# Altium PCB RMII_Dongle.PcbDoc
Units mm, origin at the board's own origin, x right, y up, seen from the top; angles counter-clockwise.
Board outline 69.6 x 35.69 mm, 2 copper layers (Top Layer, Bottom Layer); 41 components, 39 nets, 153 pads, 41 vias.
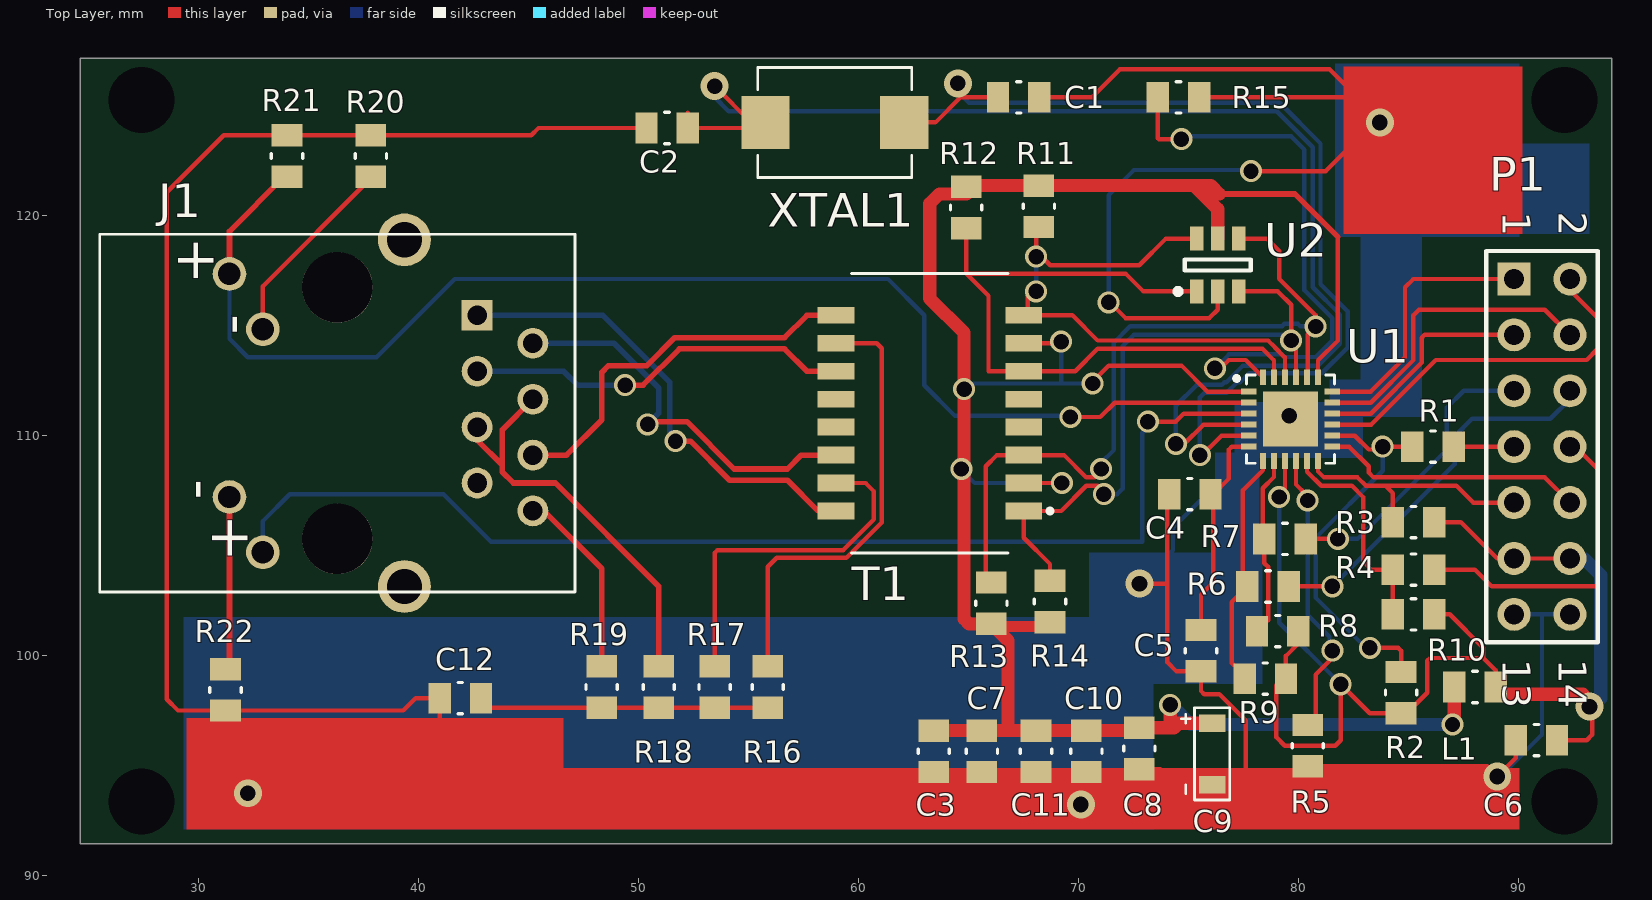
[diagram p0: Top Layer view]
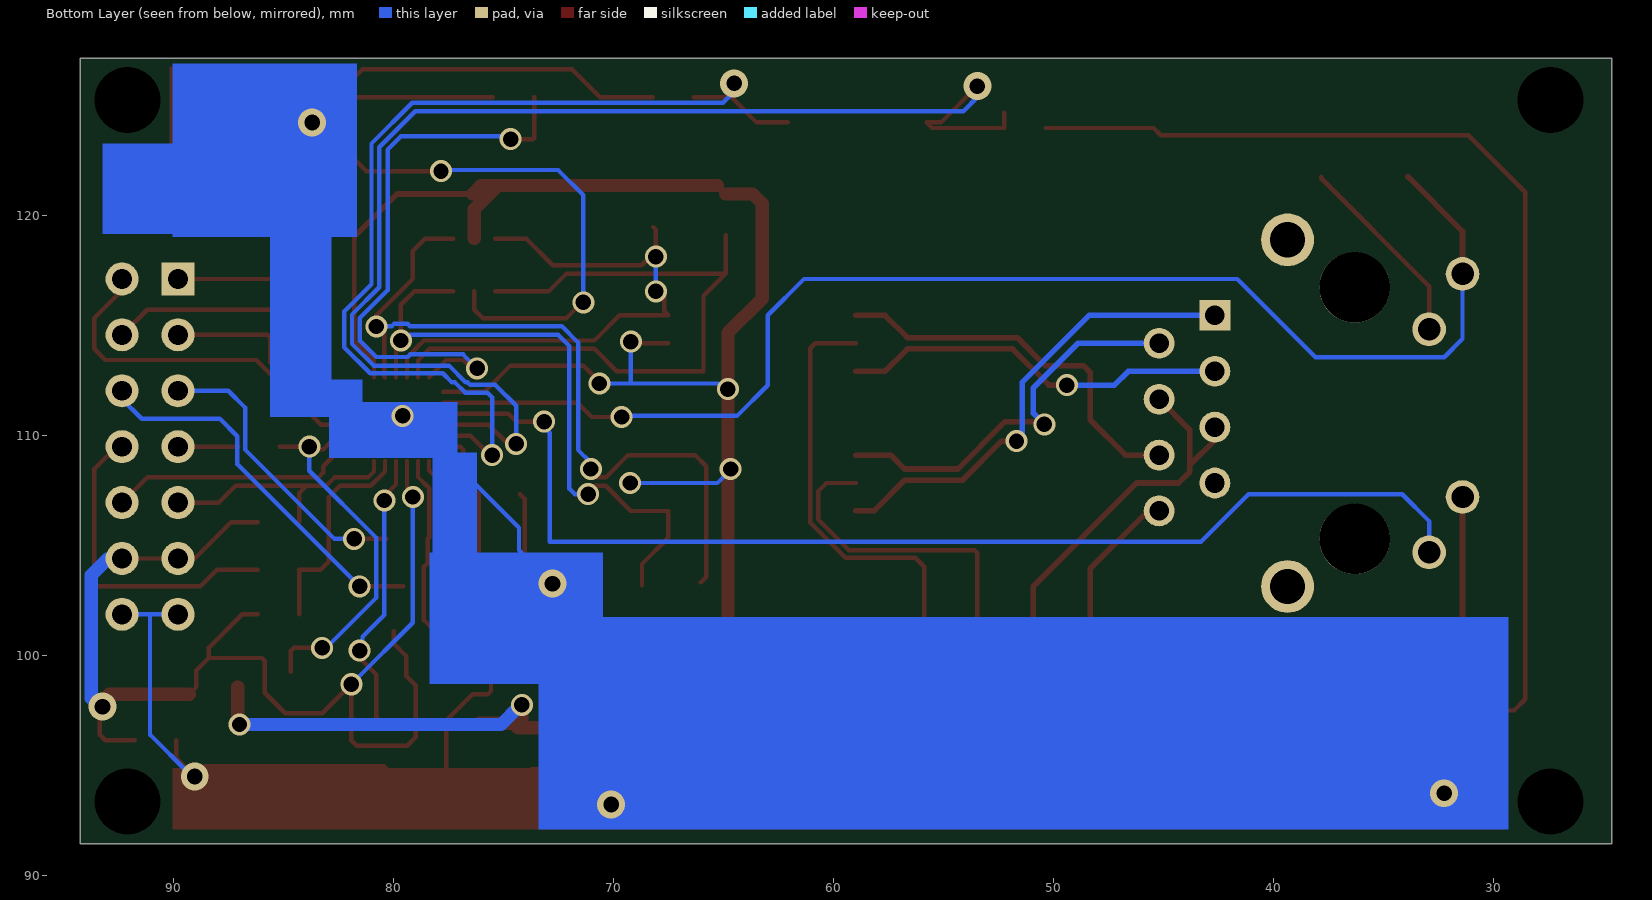
[diagram p1: Bottom Layer view, seen from below]

## Layer stack, top to bottom
Top Solder: solder mask 0.0102, Solder Resist, Dk 3.5
Top Layer: signal copper 0.0356
Dielectric 1: dielectric 0.32, FR-4, Dk 4.8
Bottom Layer: signal copper 0.0356
Bottom Solder: solder mask 0.0102, Solder Resist, Dk 3.5

## Board outline
24.638,127.127 94.234,127.127 94.234,91.44 24.638,91.44

## Design rules (kind name [scope] priority, off if disabled: settings)
Clearance [All] p1: gap=0.15 ignorepadtopadclearanceinfootprint=FALSE except(0: Arc-Hole Track-Hole SMDPad-Hole THPad-Hole Via-Hole Fill-Hole Poly-Hole Region-Hole Text-Hole)
ComponentClearance [All] p1: gap=0.15 collisioncheckmode=3 verticalgap=0.254 showdistances=FALSE
DiffPairsRouting [All] p1: maxlimit=0.254 minlimit=0.2 mostfreqgap=0.2 toplayer_minwidth=0.2 toplayer_maxwidth=0.381 toplayer_prefwidth=0.2 bottomlayer_minwidth=0.2 bottomlayer_maxwidth=0.381 bottomlayer_prefwidth=0.2 maxuncoupledlength=12.7
HoleSize [All] p1: absolutevalues=TRUE maxlimit=3.2 minlimit=0.025 maxpercent=80.000 minpercent=20.000
MatchedLengths "Schematic Matched Net Lengths_3" [InNet('RD_P')] p1: tolerance=2.54 checknetsindiffpair=TRUE checkdiffpairvsdiffpair=FALSE checkxsignals=FALSE checkothers=FALSE
MatchedLengths "Schematic Matched Net Lengths_2" [InNet('TD_N')] p2: tolerance=2.54 checknetsindiffpair=TRUE checkdiffpairvsdiffpair=FALSE checkxsignals=FALSE checkothers=FALSE
MatchedLengths "Schematic Matched Net Lengths_1" [InNet('TD_P')] p3: tolerance=2.54 checknetsindiffpair=TRUE checkdiffpairvsdiffpair=FALSE checkxsignals=FALSE checkothers=FALSE
MatchedLengths "Schematic Matched Net Lengths" [InNet('RD_N')] p4: tolerance=2.54 checknetsindiffpair=TRUE checkdiffpairvsdiffpair=FALSE checkxsignals=FALSE checkothers=FALSE
MinimumSolderMaskSliver [All] p1: minsoldermaskwidth=0.026
PolygonConnect [All] p1: connectstyle=Relief reliefconductorwidth=0.254 reliefentries=4 polygonreliefangle="90 Angle" airgapwidth=0.254
RoomDefinition RMII_Dongle [InComponentClass('RMII_Dongle')] p1: confinementstyle=ConfineIn formatcopy=TRUE lockcomponents=FALSE outline 24.638,91.567 24.511,91.44 94.234,91.44 94.234,127.254 94.107,127.127 24.638,127.127
RoutingVias [All] p1: holewidth=0.711 width=1.27 viastyle="Through Hole" minholewidth=0.711 minwidth=0.7 maxholewidth=3.2 maxwidth=3
SilkToSilkClearance [All] p1: silktosilkclearance=0.19
SilkToSolderMaskClearance [IsPad] p1 off: minsilkscreentomaskgap=0.254 clearancetoexposedcopper=TRUE
SolderMaskExpansion [All] p1: expansion=0.102
Width [All] p1: maxlimit=3 minlimit=0.15 preferedwidth=0.2
24 further rules are at their usual default settings.

## Classes and differential pairs
differential pair TD: +TD_P -TD_N
differential pair RD: +RD_P -RD_N

## Components (designator, comment, footprint, x,y, rotation, side; value= is the part's Value field where it differs from the comment)
C1 "30pF" 0805 67.285,125.349 r180 top
C2 "30pF" 0805 51.308,123.952 r0 top
C3 "100nF" 0805 63.424,95.631 r270 top
C4 "470pF" 0805 75.057,107.315 r0 top
C5 "1uF" 0805 75.565,100.203 r90 top
C6 "100nF" 0805 90.805,96.139 r0 top
C7 "100nF" 0805 65.608,95.631 r90 top
C8 "100nF" 0805 72.765,95.758 r90 top
C9 "10uF" "1206 Polarized" 75.273,97.107 r270 top
C10 "100nF" 0805 70.358,95.631 r90 top
C11 "100nF" 0805 68.072,95.631 r90 top
C12 "1nF" 0805 41.91,98.044 r0 top
J1 "J00-0045NL" "RJ45 J00-0045NL" 36.322,110.998 r90 top
L1 "IND 100UH 50MA 4 OHM SMD" 0805 88.011,98.552 r0 top value=100uH
P1 "Header 7X2" HDR2X7 89.789,117.094 r270 top
R1 "33" 0805 86.106,109.474 r0 top
R2 "10k" 0805 84.658,98.298 r270 top
R3 "1.5k" 0805 85.217,106.045 r0 top
R4 "33" 0805 85.217,103.886 r0 top
R5 "10k" 0805 80.416,95.885 r270 top
R6 "33" 0805 78.613,103.123 r0 top
R7 "33" 0805 79.384,105.283 r0 top
R8 "10k" 0805 79.051,101.092 r180 top
R9 "10k" 0805 78.486,98.933 r180 top
R10 "10k" 0805 85.217,101.854 r180 top
R11 "49.9" 0805 68.199,120.396 r270 top
R12 "49.9" 0805 64.897,120.345 r270 top
R13 "49.9" 0805 66.04,102.362 r90 top
R14 "49.9" 0805 68.707,102.438 r90 top
R15 "12.1k" 0805 74.549,125.349 r180 top
R16 "75" 0805 55.88,98.552 r270 top
R17 "75" 0805 53.467,98.552 r270 top
R18 "75" 0805 50.927,98.552 r270 top
R19 "75" 0805 48.336,98.552 r270 top
R20 "270" 0805 37.846,122.682 r90 top
R21 "10k" 0805 34.036,122.682 r90 top
R22 "270" 0805 31.242,98.425 r270 top
T1 "H1102NLT" TRANSFORMER 63.246,110.998 r180 top
U1 "LAN8742A-CZ-TR" "24-QFN (4x4)" 79.634,110.724 r0 top
U2 "USBLC6-4SC6" SOT23-6L 76.327,117.729 r90 top
XTAL1 "CRYSTAL 25.0000MHZ 8PF SMD" SMD-2 58.928,124.206 r180 top

## Footprints (in the part's own frame and the unit in brackets; to place one, negate y for a bottom-side part, rotate by r counter-clockwise, add the part's x,y. Pads: shape width x height; smd on the part's side, far side on the other; paste and mask are expansions set on the pad)
"24-QFN (4x4)" [mm]
  rect 0.71x0.27 smd: 1(-1.9,1.25) 2(-1.9,0.75) 3(-1.9,0.25) 4(-1.9,-0.25) 5(-1.9,-0.75) 6(-1.9,-1.25) 13(1.9,-1.25) 14(1.9,-0.75) 15(1.9,-0.25) 16(1.9,0.25) 17(1.9,0.75) 18(1.9,1.25)
  rect 0.27x0.71 smd: 7(-1.25,-1.9) 8(-0.75,-1.9) 9(-0.25,-1.9) 10(0.25,-1.9) 11(0.75,-1.9) 12(1.25,-1.9) 19(1.25,1.9) 20(0.75,1.9) 21(0.25,1.9) 22(-0.25,1.9) 23(-0.75,1.9) 24(-1.25,1.9)
  rect 2.5x2.5 smd: 25(0,0)
  silkscreen extent -2.55,-2 2,2
0805 [mil]
  rect 40x55 smd: 1(-37,0) 2(37,0)
  silkscreen extent -4,-28 4,28
"1206 Polarized" [mm]
  rect 0.8x1.2 smd: 1(0.2,0.8) 2(3,0.8)
  silkscreen extent -0.51,-0.6 3.68,1.6
HDR2X7 [mm] "Connector; Header; 7x2 Position"
  rect 1.5x1.5 hole 0.9: 1(0,0)
  round 1.5 hole 0.9: 2(0,2.54) 3(2.54,0) 4(2.54,2.54) 5(5.08,0) 6(5.08,2.54) 7(7.62,0) 8(7.62,2.54) 9(10.16,0) 10(10.16,2.54) 11(12.7,0) 12(12.7,2.54) 13(15.24,0) 14(15.24,2.54)
  silkscreen extent -1.27,-1.27 16.51,3.81
"RJ45 J00-0045NL" [mm]
  rect 1.398x1.398 hole 0.89: 1(4.445,-6.35)
  round 1.398 hole 0.89: 2(3.175,-8.89) 3(1.905,-6.35) 4(0.635,-8.89) 5(-0.635,-6.35) 6(-1.905,-8.89) 7(-3.175,-6.35) 8(-4.445,-8.89)
  round 1.53 hole 1.02: 9(6.325,4.9) 10(3.81,3.38) 11(-3.81,4.9) 12(-6.325,3.38)
  round 3.2 hole 3.2 unplated: None(-5.715,0) None(5.715,0)
  round 2.4 hole 1.6: S1(-7.875,-3.05) S2(7.875,-3.05)
  silkscreen extent -8.13,-10.79 8.13,10.79
SMD-2 [mm]
  rect 2.2x2.4 smd: 1(-3.15,0) 2(3.15,0)
  silkscreen extent -3.5,-2.5 3.5,2.5
SOT23-6L [mm]
  rect 1.1x0.6 smd: 1(-1.2,0.95) 2(-1.2,0) 3(-1.2,-0.95) 4(1.2,-0.95) 5(1.2,0) 6(1.2,0.95)
  silkscreen extent -1.32,-1.5 0.25,1.92, body extent -0.86,-1.51 0.87,1.52, height 1.25
TRANSFORMER [mm]
  rect 1.67x0.76 smd: 1(-4.265,4.445) 2(-4.265,3.175) 3(-4.265,1.905) 4(-4.265,0.635) 5(-4.265,-0.635) 6(-4.265,-1.905) 7(-4.265,-3.175) 8(-4.265,-4.445) 9(4.265,-4.445) 10(4.265,-3.175) 11(4.265,-1.905) 12(4.265,-0.635) 13(4.265,0.635) 14(4.265,1.905) 15(4.265,3.175) 16(4.265,4.445)
  silkscreen extent -5.56,-6.35 3.55,6.35

## Part data
C1 C2: library part "CAP 30pF 0805", "CAP CER 30PF 25V NP0 0805", Package=0805, Rating=25V, Tolerance=20%, Digikey=399-17444-1-ND, Digikey Link=https://www.digikey.ca/product-detail/en/kemet/C0805C300M3GAC7800/399-17444-1-ND/8570411, MF=Yageo, MP=C0805C300M3GAC7800, Price="0.43 CAD"
C3 C6 C7 C8 C10 C11: library part "CAP 100nF 0805", "CAP CER 0.1UF 50V X7R 0805", Package=0805, Rating=50V, Tolerance=10%, Digikey=311-1140-1-ND, Digikey Link=https://www.digikey.ca/products/en?keywords=311-1140-1-ND, MF=Yageo, MP=CC0805KRX7R9BB104, Price="0,119 CAD"
C4: library part "CAP 470pF 0805", "CAP CER 470PF 50V C0G/NPO 0805", Package=0805, Rating=50V, Tolerance=5%, Digikey=311-1119-1-ND, Digikey Link=https://www.digikey.ca/products/en?keywords=311-1119-1-ND, MF=Yageo, MP=CC0805JRNPO9BN471, Price="0,135 CAD"
C5: library part "CAP 1uF 0805", "CAP CER 1UF 50V X7R 0805", Package=0805, Rating=50V, Tolerance=10%, Digikey=1276-1029-1-ND, Digikey Link=https://www.digikey.ca/product-detail/en/samsung-electro-mechanics/CL21B105KBFNNNE/1276-1029-1-ND/3889115, MF="Samsung Electro-Mechanics", MP=CL21B105KBFNNNE, Price="0,172 CAD"
C9: library part "CAP TANT 10UF 1206", "10µF Molded Tantalum Capacitors 10V 1206 (3216 Metric) 3.8Ohm", Package="1206 KEMET", Digikey=399-3684-1-ND, Digikey Link=https://www.digikey.ca/product-detail/en/kemet/T491A106K010AT/399-3684-1-ND/819009, MF=KEMET, MP=T491A106K010AT, Price="0.59 CAD"
C12: library part "CAP 1nF 0805", "CAP CER 1000PF 50V X7R 0805", Package=0805, Rating=50V, Tolerance=10%, Digikey=311-1127-1-ND, Digikey Link=https://www.digikey.ca/products/en?keywords=311-1127-1-ND, MF=Yageo, MP=CC0805KRX7R9BB102, Price="0.1 CAD"
J1: "1 Port RJ45 Magjack Connector Through Hole 10/100 Base-TX, AutoMDIX", Package=None, Digikey=553-1619-5-ND, Digikey Link=https://www.digikey.com/product-detail/en/pulse-electronics-network/J00-0045NL/553-1619-5-ND/1036860?utm_source=snapeda&utm_medium=aggregator&utm_campaign=symbol, MF="Pulse Electronics", MP=J00-0045NL, SnapEDA_Link=https://www.snapeda.com/parts/J00-0045NL/Pulse%20Electronics%20Network/view-part/87956/?ref=snap
L1: "100µH Unshielded Wirewound Inductor 50mA 4Ohm 0805 (2012 Metric)", Digikey=587-2048-1-ND, Digikey Link=https://www.digikey.ca/product-detail/en/taiyo-yuden/LBR2012T101K/587-2048-1-ND/1788995, MF="Taiyo Yuden", MP=LBR2012T101K, Revision="July-2002: Re-released for DXP Platform."
P1: "Header, 7-Pin, Dual row", LatestRevisionDate=17-Jul-2002, LatestRevisionNote="Re-released for DXP Platform.", Publisher="Altium Limited"
R1 R4 R6 R7: library part "RES 33 0805", "RES SMD 33 OHM 1% 1/8W 0805", Package=0805, Rating=0.125W, Digikey=311-33.0CRCT-ND, Digikey Link=https://www.digikey.ca/product-detail/en/yageo/RC0805FR-0733RL/311-33.0CRCT-ND/730809, MF=Yageo, MP=RC0805FR-0733RL, Price="0.15 CAD"
R2 R5 R8 R9 R10 R21: library part "RES 10k 0805", "RES SMD 10K OHM 1% 1/8W 0805", Package=0805, Rating=0.125W, Tolerance=1%, Digikey=311-10.0KCRCT-ND, Digikey Link=https://www.digikey.ca/products/en?keywords=311-10.0KCRCT-ND, MF=Yageo, MP=RC0805FR-0710KL, Price="0.061 CAD"
R3: library part "RES 1.5k 0805", "RES SMD 1.5K OHM 1% 1/8W 0805", Package=0805, Rating=0.125W, Tolerance=1%, ComponentLink1Description=digikey, ComponentLink1URL=https://www.digikey.ca/en/products/detail/panasonic-electronic-components/ERJ-6ENF1022V/111476, Digikey=311-1.50KCRCT-ND, Digikey Link=https://www.digikey.ca/product-detail/en/yageo/RC0805FR-071K5L/311-1.50KCRCT-ND/730443, MF=Yageo, MP=RC0805FR-071K5L, Price="0.15 CAD"
R11 R12 R13 R14: library part "RES 49.9 0805", "RES SMD 49.9 OHM 1% 1/8W 0805", Package=0805, Rating=0.125W, Tolerance=1%, Digikey=311-49.9CRCT-ND, Digikey Link=https://www.digikey.ca/product-detail/en/yageo/RC0805FR-0749R9L/311-49.9CRCT-ND/730931, MF=Yageo, MP=RC0805FR-0749R9L, Price="0.15 CAD"
R15: library part "RES 12.1k 0805", "RES SMD 12.1K OHM 1% 1/8W 0805", Package=0805, Rating=0.125W, Tolerance=1%, Digikey=311-12.1KCRCT-ND, Digikey Link=https://www.digikey.ca/product-detail/en/yageo/RC0805FR-0712K1L/311-12.1KCRCT-ND/730517, MF=Yageo, MP=RC0805FR-0712K1L, Price="0.15 CAD"
R16 R17 R18 R19: library part "RES 75 0805", "RES SMD 75 OHM 1% 1/8W 0805", Package=0805, Rating=0.125W, Tolerance=1%, Digikey=311-75.0CRCT-ND, Digikey Link=https://www.digikey.ca/product-detail/en/yageo/RC0805FR-0775RL/311-75.0CRCT-ND/731079, MF=Yageo, MP=RC0805FR-0775RL, Price="0.15 CAD"
R20 R22: library part "RES 270 0805", "RES SMD 270 OHM 5% 1/8W 0805", Package=0805, Rating=0.125W, Digikey=311-270ARCT-ND, Digikey Link=https://www.digikey.ca/product-detail/en/yageo/RC0805JR-07270RL/311-270ARCT-ND/731238, MF=Yageo, MP=RC0805JR-07270RL, Price="0.054 CAD"
T1: "Isolation and Data Interface _Encapsulated_ Pulse Transformer 1:1 Transmitter, 1:1 Receiver Surface Mount", Package=SOIC-16, Digikey=553-1323-5-ND, Digikey Link=https://www.digikey.ca/en/products/detail/pulse-electronics-network/H1102NL/1036940?s=N4IgTCBcDaIBIEYEAYwDkAyIC6BfIA, MF="Pulse Electronics", MP=H1102NL, Price="7.99 CAD"
U1: "LAN8742A-CZ-TR - Small Footprint RMII 10/100 Ethernet, Transceiver with HP Auto-MDIX and flexPWR Technology SQFN-24", Digikey=LAN8742A-CZ-CT-ND, Digikey Link=https://www.digikey.ca/product-detail/en/microchip-technology/LAN8742A-CZ-TR/LAN8742A-CZ-CT-ND/8256089, MF="Microchip Technology", MP=LAN8742A-CZ-TR
XTAL1: library part "XTAL 25MHZ 8PF SMD", "25MHz ±50ppm Crystal 8pF 70 Ohms 2-SMD, No Lead", Frequency=25MHz, Load Capacitance=8pF, Package="2-SMD, No Lead", Digikey=644-1041-1-ND, Digikey Link=https://www.digikey.ca/product-detail/en/ndk-america-inc/NX5032GA-25.000000MHZ-LN-CD-1/644-1041-1-ND/1128913, ESR="70 Ohms", MF="NDK America, Inc.", MP=NX5032GA-25.000000MHZ-LN-CD-1, Price="0.95 CAD"

## Free pads (board coordinates)
  round 1.524 hole 3: 2(27.432,93.345) 2(27.432,125.222) 2(92.075,93.345) 2(92.075,125.222)

## Via types
v1: diameter 1, hole 0.7, Top Layer to Bottom Layer, tented both sides, 33 vias
v2: diameter 1.27, hole 0.711, Top Layer to Bottom Layer, 8 vias

## Nets (pads, with @x,y where several pads share a name; then routed paths per layer and width w, separated by ;. In a path a pad name is that pad's centre, name@x,y a point inside that pad or via, vN(x,y) a via of type N, cw(c..) or ccw(c..) an arc to the next point about the centre after c; other vN are vias at no path point)
+3.3V: C6.2 L1.2 P1.11 P1.12 R2.2 R3.2 R8.1 R9.1 R10.1 U1.9 | length 57.7
  Top Layer w0.2: v1@79.384,107.375 U1.9 ; R8.1 79.991,100.532 79.426,99.967 79.426,99.06 78.994,98.628 78.994,96.266 79.375,95.885 81.661,95.885 81.915,96.139 v1(81.915,98.679) 83.236,97.358 R2.2 84.912,97.358 85.852,98.298 85.852,99.746 85.979,99.873 88.392,99.873 ; R10.1 86.868,101.854 88.392,100.33 88.392,99.873 ; R3.2 87.376,106.045 89.027,104.394 P1.11 P1.12 ; L1.2@89.281,98.222 L1.2 88.951,99.314 88.392,99.873 ; C6.2 93.091,96.139 93.345,96.393 93.345,97.536 v2(93.218,97.663) 93.218,97.917 92.913,98.222
  Top Layer w0.6: L1.2@89.281,98.222 92.913,98.222
  Bottom Layer w0.2: v1(79.121,107.188) 79.121,101.473 v1@81.788,98.806 ; P1.12 P1.12@92.964,104.394
  Bottom Layer w0.6: P1.12@92.964,104.394 93.726,103.632 93.726,98.044
GND: C1.1 C2.1 C3.2 C4.1 C5.1 C6.1 C7.1 C8.1 C9.2 C10.1 C11.1 C12.1 P1.13 P1.14 R5.2 R15.1 R20.2 R21.2 R22.2 U1.25 U2.2 | length 210.5
  Top Layer w0.2: C2.1 45.466,123.952 45.136,123.622 R20.2 31.166,123.622 28.575,121.031 28.575,97.993 29.083,97.485 R22.2 39.319,97.485 39.878,98.044 C12.1 40.97,96.317 42.672,94.615 63.424,94.615 63.5,94.691 C7.1 C11.1 C10.1 72.638,94.691 C8.1 73.711,94.818 74.422,94.107 C9.2 77.597,94.107 ; C1.1 70.612,125.349 71.882,126.619 81.407,126.619 82.677,125.349 ; v1@71.501,115.951 72.136,115.316 75.945,115.316 76.327,115.698 U2.2 ; v2(72.771,103.251) 74.04,103.251 74.041,103.252 ; C4.1@74.244,107.315 74.041,107.112 74.041,103.252 ; R15.1 82.677,125.349 ; v1(77.839,121.997) 81.23,121.997 83.439,124.206 v2(83.693,124.206) ; v2@83.566,124.46 82.677,125.349 ; v2@89.332,94.488 v2(89.027,94.488) ; C6.1 89.865,95.326 v2(89.027,94.488) ; 74.041,103.252 74.041,99.676 74.454,99.263 C5.1 75.565,98.374 75.717,98.222 76.403,98.222 77.597,97.028 77.597,94.107 ; 77.597,94.107 79.578,94.107 R5.2 88.57,94.945 v2(89.027,94.488)
  Bottom Layer w0.2: v1(71.374,116.028) 71.374,120.904 72.517,122.047 v1@77.755,122.047 ; v2@73.025,103.505 74.295,104.775 74.295,105.791 79.325,110.821 80.722,110.821 ; 83.693,113.792 v2(83.693,124.206) ; v2@89.281,94.615 91.059,96.393 91.059,101.854 ; P1.13 91.059,101.854 ; P1.14 91.059,101.854
  other v1: 79.578,110.871
  other v2: 70.104,93.218 32.258,93.726
LA: J1.9 R21.1 U1.2 | length 61.1
  Top Layer w0.2: v1(69.629,110.821) 70.993,110.821 71.646,111.474 U1.2
  Top Layer w0.254: J1.9 31.422,119.255 R21.1@33.909,121.742
  Bottom Layer w0.2: J1.9 31.422,114.374 32.258,113.538 38.102,113.538 41.658,117.094 61.341,117.094 62.992,115.443 62.992,112.268 64.389,110.871 v1@69.469,110.871
LAN_VDD1A: C3.1 C7.2 C8.2 C9.1 C10.2 C11.2 L1.1 R11.1 R12.1 R13.1 R14.1 T1.2 T1.7 U1.1 U1.19 U2.5 | length 109.5
  Top Layer w0.2: R12.1@64.897,120.955 R12.1@65.278,121.336 ; R13.1 R13.1@66.167,101.295 ; T1.2 v1@68.961,107.823 ; T1.7 v1@68.961,114.173 ; v1@70.739,112.522 71.374,113.157 74.679,113.157 75.862,111.974 U1.1 ; C8.2@72.638,96.571 C8.2 ; U1.19 80.884,113.396 81.788,114.3 81.788,118.999 ; v1@87.046,96.825 v1@87.071,96.85
  Top Layer w0.254: 76.403,120.955 79.832,120.955 81.788,118.999
  Top Layer w0.5: R13.1@66.167,101.295 R14.1@68.707,101.295
  Top Layer w0.6: C3.1@63.5,96.571 C7.2 66.802,96.571 ; R12.1@64.897,120.955 63.678,120.955 63.246,120.523 63.246,116.205 64.803,114.648 v1(64.803,112.091) 64.803,101.644 65.024,101.422 R13.1 ; R12.1@65.278,121.336 R11.1 75.26,121.336 ; R13.1@66.167,101.295 66.802,100.66 66.802,96.571 ; C8.2@72.638,96.571 C10.2 C11.2 66.802,96.571 ; C8.2 74.168,96.698 ; v1(74.168,97.739) 74.168,96.698 ; C9.1 74.555,96.907 74.346,96.698 74.168,96.698 ; U2.5 76.327,120.269 75.26,121.336 ; 76.403,120.955 76.022,121.336 75.26,121.336 ; v1@87.071,96.85 L1.1
  Bottom Layer w0.2: v1@64.77,108.331 65.278,107.823 v1(69.248,107.823) ; v1@65.024,112.141 65.228,112.345 69.215,112.345 ; v1(69.215,114.25) 69.215,112.345 ; v1(70.645,112.345) 69.215,112.345
  Bottom Layer w0.6: v1@74.295,97.663 75.108,96.85 v1(86.995,96.85)
  other v1: 64.676,108.458
LC: J1.10 R20.1 | length 9
  Top Layer w0.2: J1.10 32.942,116.762 37.846,121.666 R20.1
NetC1_2: C1.2 U1.5 XTAL1.1 | length 44.9
  Top Layer w0.2: XTAL1.1 63.5,124.206 64.643,125.349 C1.2 ; v1@75.489,108.966 76.497,109.974 U1.5
  Bottom Layer w0.2: v2@64.516,125.603 65.024,125.095 79.146,125.095 80.995,123.246 80.995,116.858 82.234,115.619 82.234,113.984 81.057,112.807 77.755,112.807 77.343,112.395 77.203,112.395 76.738,111.93 75.735,111.93 75.514,111.709 v1(75.514,109.093)
  other v2: 64.516,125.984
NetC2_2: C2.2 U1.4 XTAL1.2 | length 58.5
  Top Layer w0.2: C2.2@52.248,124.638 C2.2 55.524,123.952 XTAL1.2 55.118,124.206 v2(53.467,125.857) ; v1@74.803,109.601 75.676,110.474 U1.4
  Bottom Layer w0.2: v2@53.467,125.349 54.102,124.714 79.014,124.714 80.645,123.083 80.645,116.713 81.884,115.474 81.884,114.142 80.899,113.157 77.47,113.157 76.708,112.395 76.626,112.395 76.511,112.28 75.373,112.28 74.422,111.329 v1(74.422,109.601)
NetC4_2: C4.2 C5.2 U1.6 | length 9.7
  Top Layer w0.2: C5.2 75.565,102.742 76.124,103.301 76.124,107.315 76.835,108.026 76.835,109.347 76.962,109.474 U1.6
NetC12_2: C12.2 R16.2 R17.2 R18.2 R19.2 | length 13.2
  Top Layer w0.2: C12.2 43.282,97.612 R19.2 R18.2 R17.2 R16.2
NetJ1_1: J1.1 T1.16 | length 21.3
  Top Layer w0.254: v1(51.689,109.728) 52.368,109.728 54.146,107.95 56.769,107.95 58.166,106.553 T1.16
  Bottom Layer w0.254: J1.1 48.387,115.443 51.435,112.395 51.435,110.109 v1@51.689,109.855
NetJ1_2: J1.2 T1.14 | length 18
  Top Layer w0.254: v1(50.419,110.49) 50.538,110.609 52.205,110.609 54.356,108.458 56.769,108.458 57.404,109.093 T1.14
  Bottom Layer w0.254: J1.2 48.895,114.173 50.927,112.141 50.927,110.998 v1@50.546,110.617
NetJ1_3: J1.3 T1.11 | length 17.7
  Top Layer w0.254: v1(49.403,112.268) 50.216,112.268 51.867,113.919 56.642,113.919 57.658,112.903 T1.11
  Bottom Layer w0.254: J1.3 46.609,112.903 47.244,112.268 v1(49.403,112.268)
NetJ1_4: J1.4 J1.5 R18.1 | length 19
  Top Layer w0.254: J1.5 42.672,109.779 43.815,108.636 ; J1.4 43.815,110.236 43.815,108.636 ; R18.1 50.927,103.124 46.228,107.823 44.323,107.823 43.815,108.331 43.815,108.636
NetJ1_6: J1.6 T1.9 | length 17.7
  Top Layer w0.254: J1.6 46.736,109.093 48.336,110.693 48.336,112.852 48.641,113.157 50.386,113.157 51.656,114.427 56.642,114.427 57.658,115.443 T1.9
NetJ1_8: J1.8 R19.1 | length 8.7
  Top Layer w0.254: J1.8 45.72,106.553 48.336,103.937 R19.1
NetP1_2: P1.2 U1.15 | length 17.2
  Top Layer w0.2: U1.15 83.296,110.474 86.233,113.411 93.091,113.411 93.599,113.919 93.599,115.316 92.329,116.586 P1.2
NetR1_1: R1.1 R2.1 U1.14 | length 17.7
  Top Layer w0.2: U1.14 82.558,109.974 83.185,109.347 v1@83.82,109.347 ; v1(83.236,100.33) 84.531,100.33 84.658,100.203 R2.1 ; v1(83.82,109.474) R1.1
  Bottom Layer w0.2: v1(83.236,100.33) 83.058,100.33 80.772,102.616 80.772,105.328 83.82,108.376 v1@83.82,109.347
NetR4_1: R4.1 R10.2 U1.11 | length 10
  Top Layer w0.2: U1.11 80.384,108.338 81.026,107.696 82.423,107.696 82.931,107.188 82.931,104.267 83.312,103.886 R4.1 R10.2
NetR5_1: R5.1 U1.10 | length 12.5
  Top Layer w0.2: U1.10 79.884,107.755 v1@80.324,107.315 ; R5.1 80.772,97.181 80.772,99.111 81.534,99.873 v1(81.534,100.203)
  Bottom Layer w0.2: v1(80.416,107.029) 80.416,101.829 81.407,100.838 v1@81.407,100.457
NetR6_1: R6.1 R9.2 U1.7 | length 10.8
  Top Layer w0.2: R9.2@77.546,99.06 76.962,99.644 76.962,102.412 R6.1 77.47,103.326 77.47,107.491 78.384,108.405 U1.7
NetR7_1: R7.1 R8.2 U1.8 | length 8.3
  Top Layer w0.2: R8.2 78.613,101.594 78.613,104.013 78.444,104.182 R7.1 78.371,105.356 78.371,107.581 78.884,108.094 U1.8
NetR15_2: R15.2 U1.24 | length 26
  Top Layer w0.2: R15.2 73.609,123.495 73.66,123.444 v1(74.676,123.444) ; v1@76.581,113.157 76.835,113.411 77.597,113.411 U1.24
  Bottom Layer w0.2: v1@74.803,123.571 79.662,123.571 80.264,122.969 80.264,116.586 81.534,115.316 81.534,114.3 80.784,113.55 79.351,113.55 79.236,113.665 76.835,113.665 v1(76.2,113.03)
NetR16_1: R16.1 T1.10 | length 20.6
  Top Layer w0.2: R16.1 55.88,104.013 56.292,104.425 59.454,104.425 61.056,106.027 61.056,113.95 60.833,114.173 T1.10
NetR17_1: R17.1 T1.15 | length 16.2
  Top Layer w0.2: R17.1 53.467,104.648 53.594,104.775 59.309,104.775 60.706,106.172 60.706,107.442 60.325,107.823 T1.15
RA: J1.12 U1.3 | length 53.1
  Top Layer w0.2: v1(73.152,110.609) 74.41,110.609 74.775,110.974 U1.3
  Bottom Layer w0.2: J1.12 32.942,106.094 34.163,107.315 41.148,107.315 43.307,105.156 72.898,105.156 72.898,110.109 73.152,110.363 v1(73.152,110.609)
RC: J1.11 R22.1 | length 7.9
  Top Layer w0.254: R22.1 31.422,99.545 J1.11
RD_N: R11.2 T1.8 U1.22 U2.6 | length 25.4
  Top Layer w0.2: v1@67.818,116.459 67.691,116.332 67.691,115.623 T1.8 69.723,115.443 70.866,114.3 78.613,114.3 78.912,114.001 78.912,113.989 79.351,113.55 79.363,113.55 79.384,113.529 U1.22 ; R11.2 68.072,119.329 v1(68.072,118.11) 68.326,118.11 68.713,117.723 72.765,117.723 73.971,118.929 U2.6
  Bottom Layer w0.2: v1(68.072,116.529) v1@68.072,117.856
RD_P: R12.2 T1.6 U1.23 U2.1 | length 31.8
  Top Layer w0.2: R12.2@64.897,119.075 64.897,117.348 64.922,117.323 ; U2.1 72.949,116.529 72.155,117.323 64.922,117.323 ; U1.23 78.884,113.394 78.359,113.919 70.866,113.919 69.85,112.903 T1.6 65.913,112.903 65.913,116.332 64.922,117.323
RMII_CRS_DV: P1.8 R4.2 | length 14.7
  Top Layer w0.2: R4.2 88.011,103.886 88.773,103.124 93.471,103.124 93.599,103.252 93.599,108.458 92.583,109.474 P1.8
RMII_MDC: P1.10 U1.13 | length 12
  Top Layer w0.2: U1.13 82.296,109.474 83.185,108.585 83.185,108.299 83.407,108.077 91.186,108.077 P1.10
RMII_MDIO: P1.9 R3.1 U1.12 | length 11.8
  Top Layer w0.2: U1.12 80.884,108.346 81.153,108.077 82.677,108.077 83.058,107.696 83.947,107.696 ; R3.1 84.277,107.366 83.947,107.696 ; P1.9 87.935,106.934 87.173,107.696 83.947,107.696
RMII_REF_CLK: P1.7 R1.2 | length 2.9
  Top Layer w0.2: R1.2 P1.7 P1.7@89.662,109.347
RMII_RXD0: P1.5 R7.2 | length 13.2
  Top Layer w0.2: R7.2 v1@81.661,105.283
  Bottom Layer w0.2: v1(81.788,105.283) 82.677,105.283 86.741,109.347 86.741,111.252 87.503,112.014 P1.5
RMII_RXD1: P1.6 R6.2 | length 17.2
  Top Layer w0.2: R6.2 v1@81.279,103.123
  Bottom Layer w0.2: v1(81.534,103.124) 87.091,108.681 87.091,109.951 87.884,110.744 91.44,110.744 92.329,111.633 P1.6
RMII_TX_EN: P1.3 U1.16 | length 10.4
  Top Layer w0.2: U1.16 83.275,110.974 85.598,113.297 85.598,114.427 85.725,114.554 P1.3
RMII_TXD0: P1.4 U1.17 | length 14.2
  Top Layer w0.2: U1.17 83.28,111.474 85.217,113.411 85.217,115.443 85.471,115.697 91.186,115.697 P1.4
RMII_TXD1: P1.1 U1.18 | length 12.2
  Top Layer w0.2: U1.18 83.272,111.974 84.836,113.538 84.836,116.713 85.217,117.094 P1.1
TD_N: R13.2 T1.3 U1.20 U2.4 | length 35
  Top Layer w0.2: R13.2 65.786,103.556 65.786,108.585 66.294,109.093 T1.3 69.342,109.093 70.358,108.077 70.739,108.077 v1@70.866,108.204 ; U2.4 78.556,118.929 79.121,118.364 79.121,117.095 80.772,115.444 v1(80.772,114.935) 80.412,114.575 80.412,112.652 U1.20
  Bottom Layer w0.2: v1(71.026,108.458) 71.026,108.745 71.609,109.328 71.609,114.212 72.351,114.954 79.255,114.954 79.351,115.05 79.972,115.05 80.068,114.954 80.372,114.954 v1@80.391,114.935
TD_P: R14.2 T1.1 U1.21 U2.3 | length 29
  Top Layer w0.2: R14.2@68.707,103.175 68.707,104.14 67.511,105.336 T1.1 69.215,106.553 70.358,107.696 70.866,107.696 v1@70.993,107.569 ; U2.3 79.051,116.529 79.662,115.918 v1(79.662,114.3) 79.884,114.078 U1.21
  Bottom Layer w0.2: v1(71.153,107.315) 71.755,107.315 72.009,107.569 72.009,114.046 72.517,114.554 79.248,114.554 v1@79.375,114.427
pads on no net: J1.7 J1.None J1.S1 J1.S2 T1.4 T1.5 T1.12 T1.13

## Other copper
Top Layer:
  rectangle net GND: 82.042,119.126 90.17,126.746
  rectangle net GND: 45.72,92.075 90.043,94.869
  rectangle net GND: 29.464,92.075 46.609,97.155
Bottom Layer:
  rectangle net GND: 70.485,98.679 78.359,104.673
  rectangle net GND: 76.2,103.378 78.232,109.22
  rectangle net GND: 81.407,111.125 83.185,112.522
  rectangle net GND: 77.089,108.966 82.931,111.506
  rectangle net GND: 82.804,110.821 85.598,119.507
  rectangle net GND: 81.661,118.999 90.043,126.873
  rectangle net GND: 82.55,119.126 93.218,123.246
  rectangle net GND: 29.337,92.075 73.406,101.727

## Silkscreen, mask and mechanical layers (free items; w line width, h text height)
Mechanical 1:
  the board outline again, w1.2

## Text inside footprints (layer, text, board x,y; h text height)
J1: Top Overlay "+" at 32.245,104.249 h1.88 r90; Top Overlay "-" at 30.716,107.051 h1.88 r90; Top Overlay "-" at 32.373,114.567 h1.88 r90; Top Overlay "+" at 30.718,116.863 h1.88 r90; Mechanical 4 "12" at 34.92,103.245 h1.88 r90; Mechanical 4 "11" at 33.517,106.671 h1.88 r90; Mechanical 4 "10" at 35.17,113.802 h1.88 r90; Mechanical 4 "9" at 33.518,117.233 h1.88 r90; Mechanical 4 "FRONT" at 29.886,109.406 h1.88 r90; Mechanical 4 "RIGHT" at 26.697,103.671 h1.88 r90; Mechanical 4 "LEFT" at 26.686,116.1 h1.88 r90; Mechanical 4 "2" at 44.856,114.821 h1.88 r90; Mechanical 4 "4" at 44.846,112.271 h1.88 r90; Mechanical 4 "6" at 44.875,109.721 h1.88 r90; Mechanical 4 "8" at 44.864,107.171 h1.88 r90; Mechanical 4 "7" at 42.306,108.449 h1.88 r90; Mechanical 4 "5" at 42.317,110.998 h1.88 r90; Mechanical 4 "3" at 42.303,113.545 h1.88 r90; Mechanical 4 "1" at 42.315,116.103 h1.88 r90; Mechanical 4 "12" at 34.92,103.245 h1.88 r90; Mechanical 4 "11" at 33.517,106.671 h1.88 r90; Mechanical 4 "10" at 35.17,113.802 h1.88 r90; Mechanical 4 "9" at 33.518,117.233 h1.88 r90; Mechanical 4 "FRONT" at 29.886,109.406 h1.88 r90; Mechanical 4 "RIGHT" at 26.697,103.671 h1.88 r90; Mechanical 4 "LEFT" at 26.686,116.1 h1.88 r90; Mechanical 4 "2" at 44.856,114.821 h1.88 r90; Mechanical 4 "4" at 44.846,112.271 h1.88 r90; Mechanical 4 "6" at 44.875,109.721 h1.88 r90; Mechanical 4 "8" at 44.864,107.171 h1.88 r90; Mechanical 4 "7" at 42.306,108.449 h1.88 r90; Mechanical 4 "5" at 42.317,110.998 h1.88 r90; Mechanical 4 "3" at 42.303,113.545 h1.88 r90; Mechanical 4 "1" at 42.315,116.103 h1.88 r90
P1: Top Overlay "2" at 91.821,120.142 h1.27 r270; Top Overlay "1" at 89.281,120.142 h1.27 r270; Top Overlay "14" at 91.821,99.822 h1.27 r270; Top Overlay "13" at 89.281,99.822 h1.27 r270